# Altium PCB 2024-12-09_04-06-28.PcbDoc
Units mil, origin at the board's own origin, x right, y up, seen from the top; angles counter-clockwise.
Board outline 1390 x 869 mil, 4 copper layers (Top Layer, MidLayer1, MidLayer2, Bottom Layer); 1 components, 1 nets, 2 pads, 2 vias.
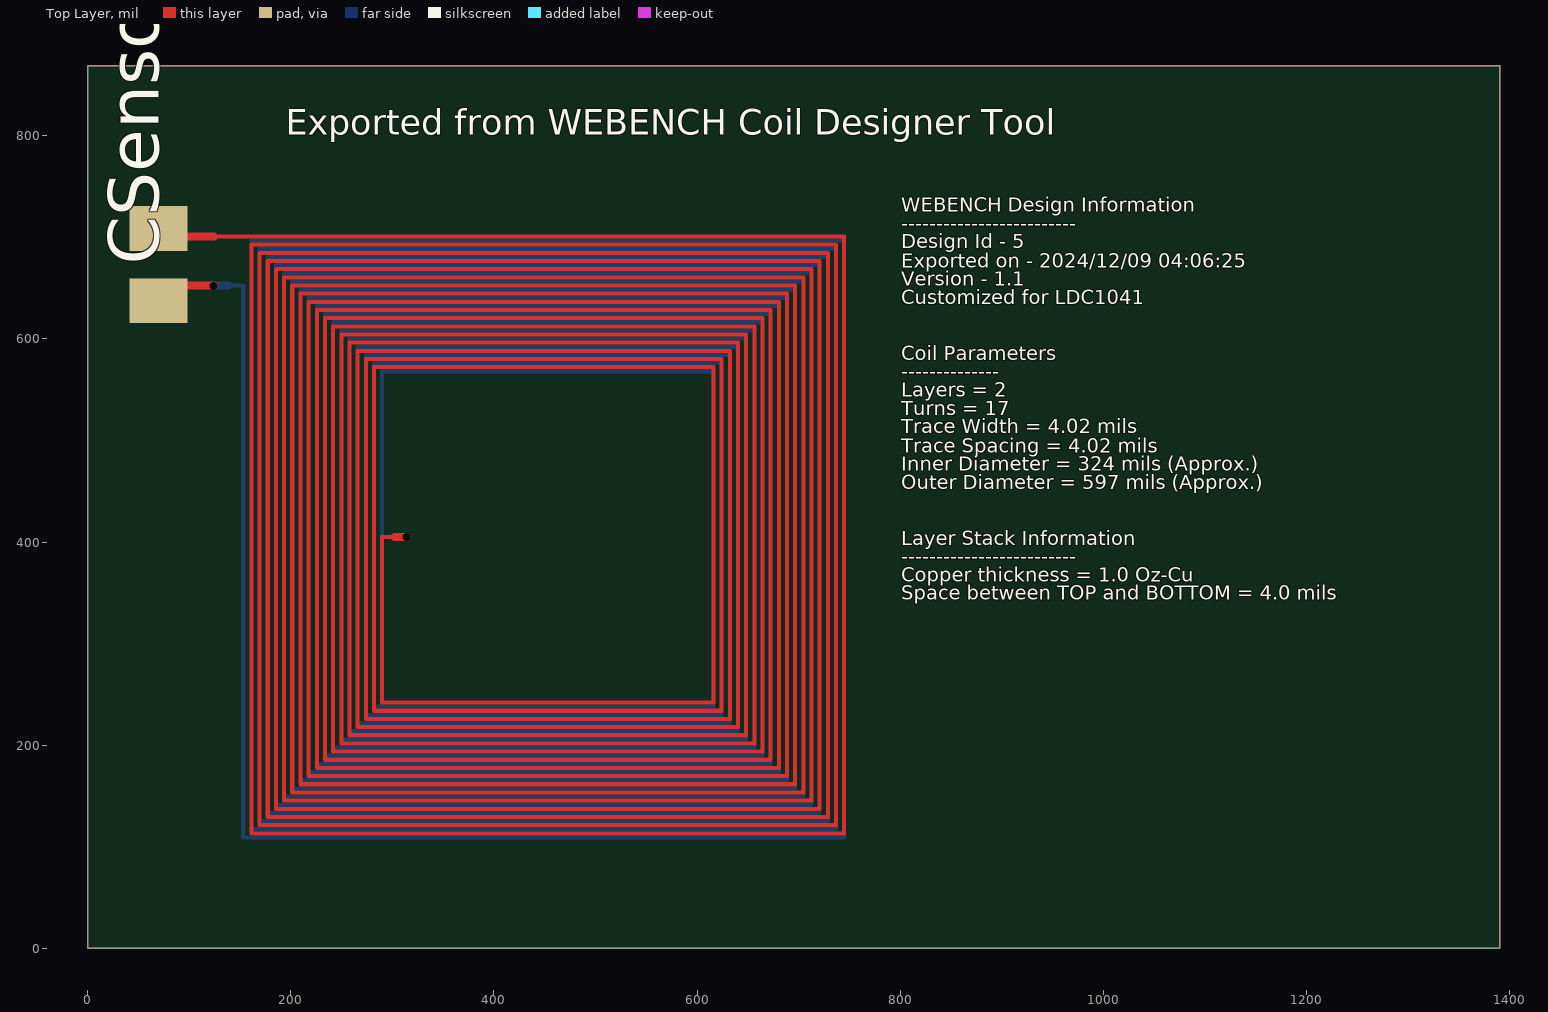
[diagram p0: Top Layer view]
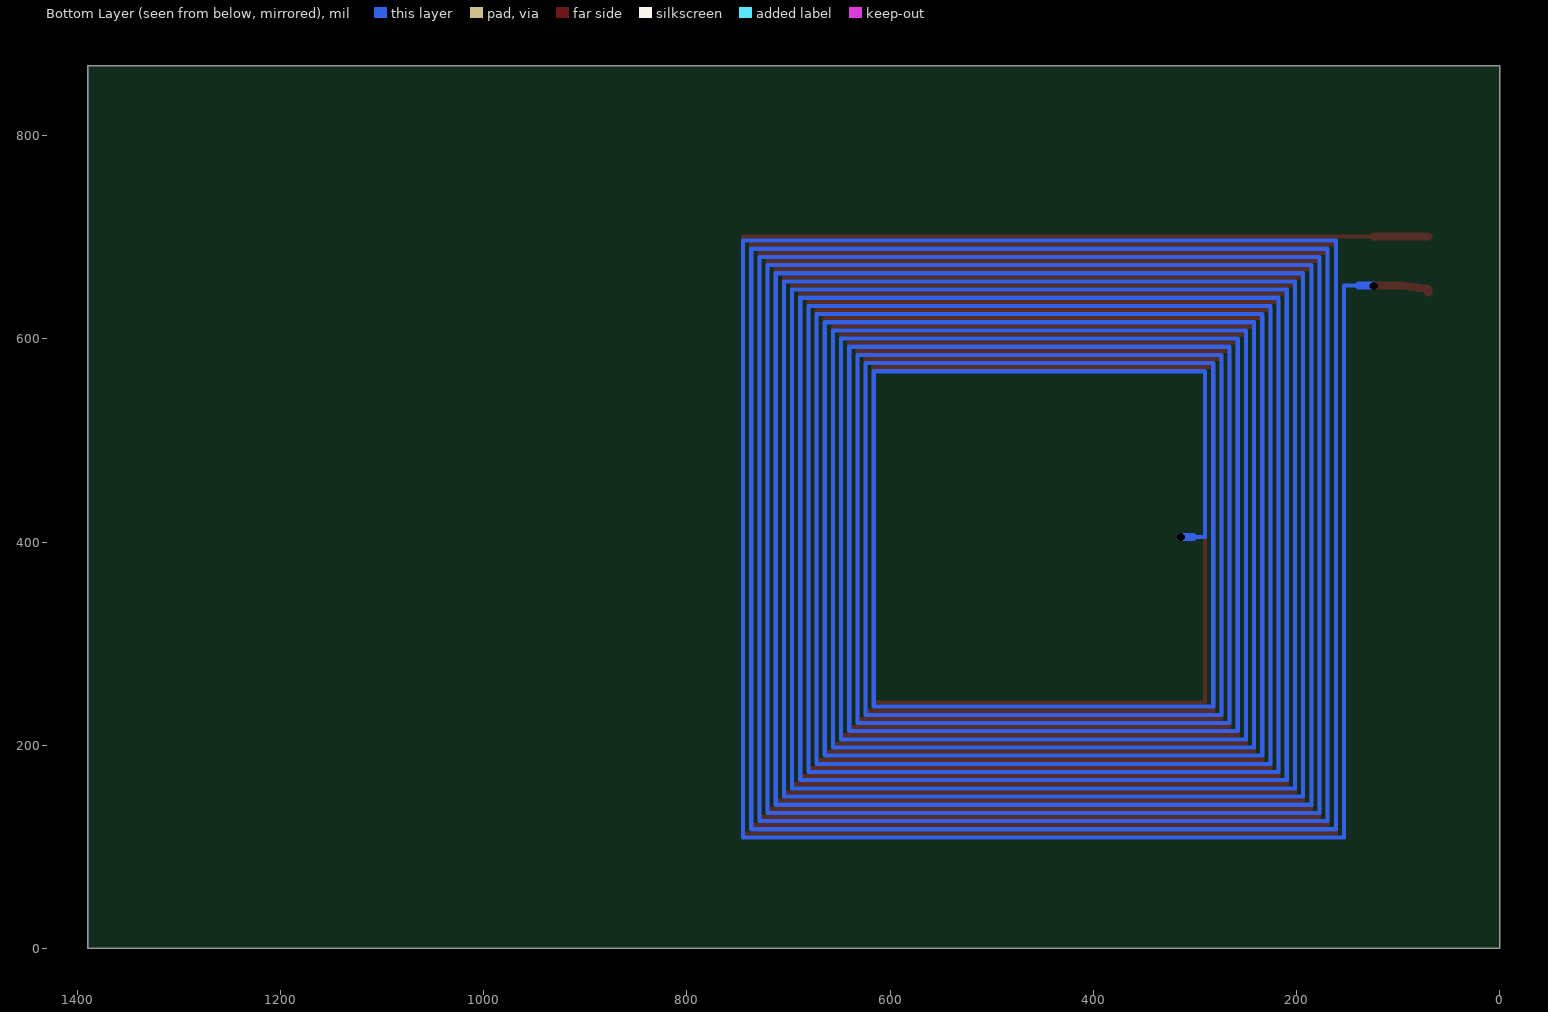
[diagram p1: Bottom Layer view, seen from below]

## Layer stack, top to bottom
Top Layer: signal copper 1.4
Dielectric: core 12.6, FR-4, Dk 4.8
MidLayer1: signal copper 1.4
Dielectric: prepreg 12.6, FR-4, Dk 4.8
MidLayer2: signal copper 1.4
Dielectric: core 12.6, FR-4, Dk 4.8
Bottom Layer: signal copper 1.4

## Board outline
0,0 1390,0 1390,869 0,869

## Design rules (kind name [scope] priority, off if disabled: settings)
PlaneConnect [All] p0: scope1count=1 scope1_0_kind=Board scope1_0_value=Board scope2count=1 scope2_0_kind=Board scope2_0_value=Board commentlength=0 planeconnectstyle=Direct reliefexpansion=20 reliefentries=4 reliefconductorwidth=10 reliefairgap=10
PlaneConnect [All] p1: planeconnectstyle=Direct reliefexpansion=20 reliefentries=4 reliefconductorwidth=10 reliefairgap=10
PolygonConnect [All] p0: scope1count=1 scope1_0_kind=Board scope1_0_value=Board scope2count=1 scope2_0_kind=Board scope2_0_value=Board commentlength=0 connectstyle=Direct reliefconductorwidth=10 reliefentries=4 polygonreliefangle="90 Angle"
PolygonConnect [All] p1: connectstyle=Direct reliefconductorwidth=10 reliefentries=4 polygonreliefangle="90 Angle"

## Components (designator, comment, footprint, x,y, rotation, side; value= is the part's Value field where it differs from the comment)
CSensor "" 0805 70,673 r90 top

## Footprints (in the part's own frame and the unit in brackets; to place one, negate y for a bottom-side part, rotate by r counter-clockwise, add the part's x,y. Pads: shape width x height; smd on the part's side, far side on the other; paste and mask are expansions set on the pad)
0805 [mil]
  rect 44x57 smd: 1(-35.5,0) 2(35.5,0)

## Via types
v1: diameter 0, hole 8, Top Layer to Bottom Layer, 2 vias

## Nets (pads, with @x,y where several pads share a name; then routed paths per layer and width w, separated by ;. In a path a pad name is that pad's centre, name@x,y a point inside that pad or via, vN(x,y) a via of type N, cw(c..) or ccw(c..) an arc to the next point about the centre after c; other vN are vias at no path point)
3: CSensor.1 CSensor.2 | length 62565.5
  Top Layer w4.02: 124.38,700.73 138.85,700.73 153.32,700.73 744.77,700.73 744.77,113.29 161.36,113.29 161.36,692.69 736.73,692.69 736.73,121.33 169.4,121.33 169.4,684.65 728.69,684.65 728.69,129.37 177.44,129.37 177.44,676.61 720.65,676.61 720.65,137.41 185.48,137.41 185.48,668.57 712.61,668.57 712.61,145.45 193.52,145.45 193.52,660.53 704.57,660.53 704.57,153.49 201.56,153.49 201.56,652.49 696.53,652.49 696.53,161.53 209.6,161.53 209.6,644.45 688.49,644.45 688.49,169.57 217.64,169.57 217.64,636.41 680.45,636.41 680.45,177.61 225.68,177.61 225.68,628.37 672.41,628.37 672.41,185.65 233.72,185.65 233.72,620.33 664.37,620.33 664.37,193.69 241.76,193.69 241.76,612.29 656.33,612.29 656.33,201.73 249.8,201.73 249.8,604.25 648.29,604.25 648.29,209.77 257.84,209.77 257.84,596.21 640.25,596.21 640.25,217.81 265.88,217.81 265.88,588.17 632.21,588.17 632.21,225.85 273.92,225.85 273.92,580.13 624.17,580.13 624.17,233.89 281.96,233.89 281.96,572.09 616.13,572.09 616.13,241.93 290,241.93 290,405 302.06,405
  Top Layer w8.04: CSensor.1@70.43,645.73 70.43,649.11 97.4,652.49 124.38,652.49 ; CSensor.2@70.43,700.73 97.4,700.73 124.38,700.73 ; 302.06,405 314.12,405
  Bottom Layer w4.02: 138.85,652.49 153.32,652.49 153.32,109.27 744.77,109.27 744.77,696.71 161.36,696.71 161.36,117.31 736.73,117.31 736.73,688.67 169.4,688.67 169.4,125.35 728.69,125.35 728.69,680.63 177.44,680.63 177.44,133.39 720.65,133.39 720.65,672.59 185.48,672.59 185.48,141.43 712.61,141.43 712.61,664.55 193.52,664.55 193.52,149.47 704.57,149.47 704.57,656.51 201.56,656.51 201.56,157.51 696.53,157.51 696.53,648.47 209.6,648.47 209.6,165.55 688.49,165.55 688.49,640.43 217.64,640.43 217.64,173.59 680.45,173.59 680.45,632.39 225.68,632.39 225.68,181.63 672.41,181.63 672.41,624.35 233.72,624.35 233.72,189.67 664.37,189.67 664.37,616.31 241.76,616.31 241.76,197.71 656.33,197.71 656.33,608.27 249.8,608.27 249.8,205.75 648.29,205.75 648.29,600.23 257.84,600.23 257.84,213.79 640.25,213.79 640.25,592.19 265.88,592.19 265.88,221.83 632.21,221.83 632.21,584.15 273.92,584.15 273.92,229.87 624.17,229.87 624.17,576.11 281.96,576.11 281.96,237.91 616.13,237.91 616.13,568.07 290,568.07 290,405 302.06,405
  Bottom Layer w8.04: 124.38,652.49 138.85,652.49 ; 302.06,405 314.12,405
  other v1: 314,405 124,652

## Other copper
Multi-Layer:
  the board outline again, w1

## Silkscreen, mask and mechanical layers (free items; w line width, h text height)
Top Overlay:
  text "Exported from WEBENCH Coil Designer Tool" at 195,801 h25
  text "WEBENCH Design Information" at 801,725 h14
  text "-------------------------" at 801,707 h14
  text "Design Id - 5" at 801,689 h14
  text "Exported on - 2024/12/09 04:06:25" at 801,670 h14
  text "Version - 1.1" at 801,652 h14
  text "Customized for LDC1041" at 801,634 h14
  text "Coil Parameters" at 801,579 h14
  text "--------------" at 801,561 h14
  text "Layers = 2" at 801,543 h14
  text "Turns = 17" at 801,525 h14
  text "Trace Width = 4.02 mils" at 801,507 h14
  text "Trace Spacing = 4.02 mils" at 801,488 h14
  text "Inner Diameter = 324 mils (Approx.)" at 801,470 h14
  text "Outer Diameter = 597 mils (Approx.)" at 801,452 h14
  text "Layer Stack Information" at 801,397 h14
  text "-------------------------" at 801,379 h14
  text "Copper thickness = 1.0 Oz-Cu" at 801,361 h14
  text "Space between TOP and BOTTOM = 4.0 mils" at 801,343 h14